# Altium PCB ESC.PcbDoc
Units mil, origin at the board's own origin, x right, y up, seen from the top; angles counter-clockwise.
Board outline 1770 x 2730 mil, 2 copper layers (Top Layer, Bottom Layer); 74 components, 54 nets, 303 pads, 42 vias.
Unrouted connection lines stored in the file: 85.
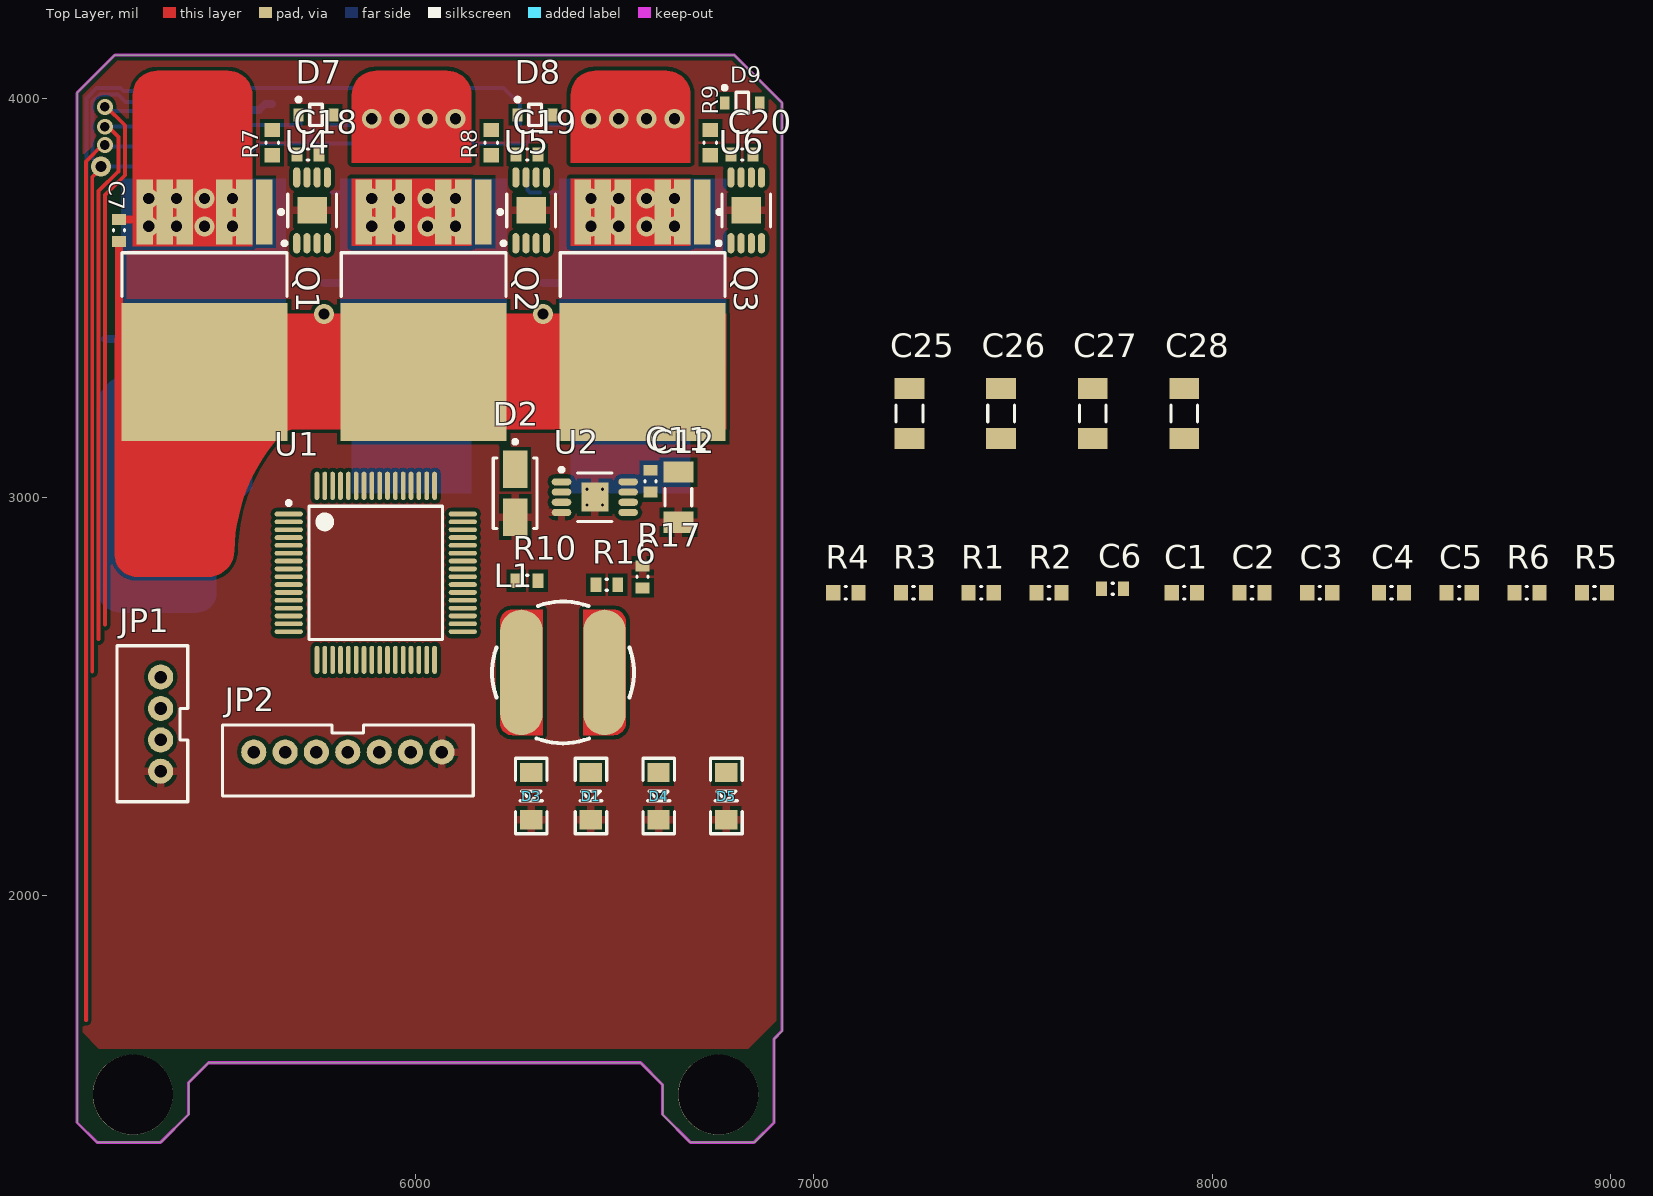
[diagram p0: Top Layer view]
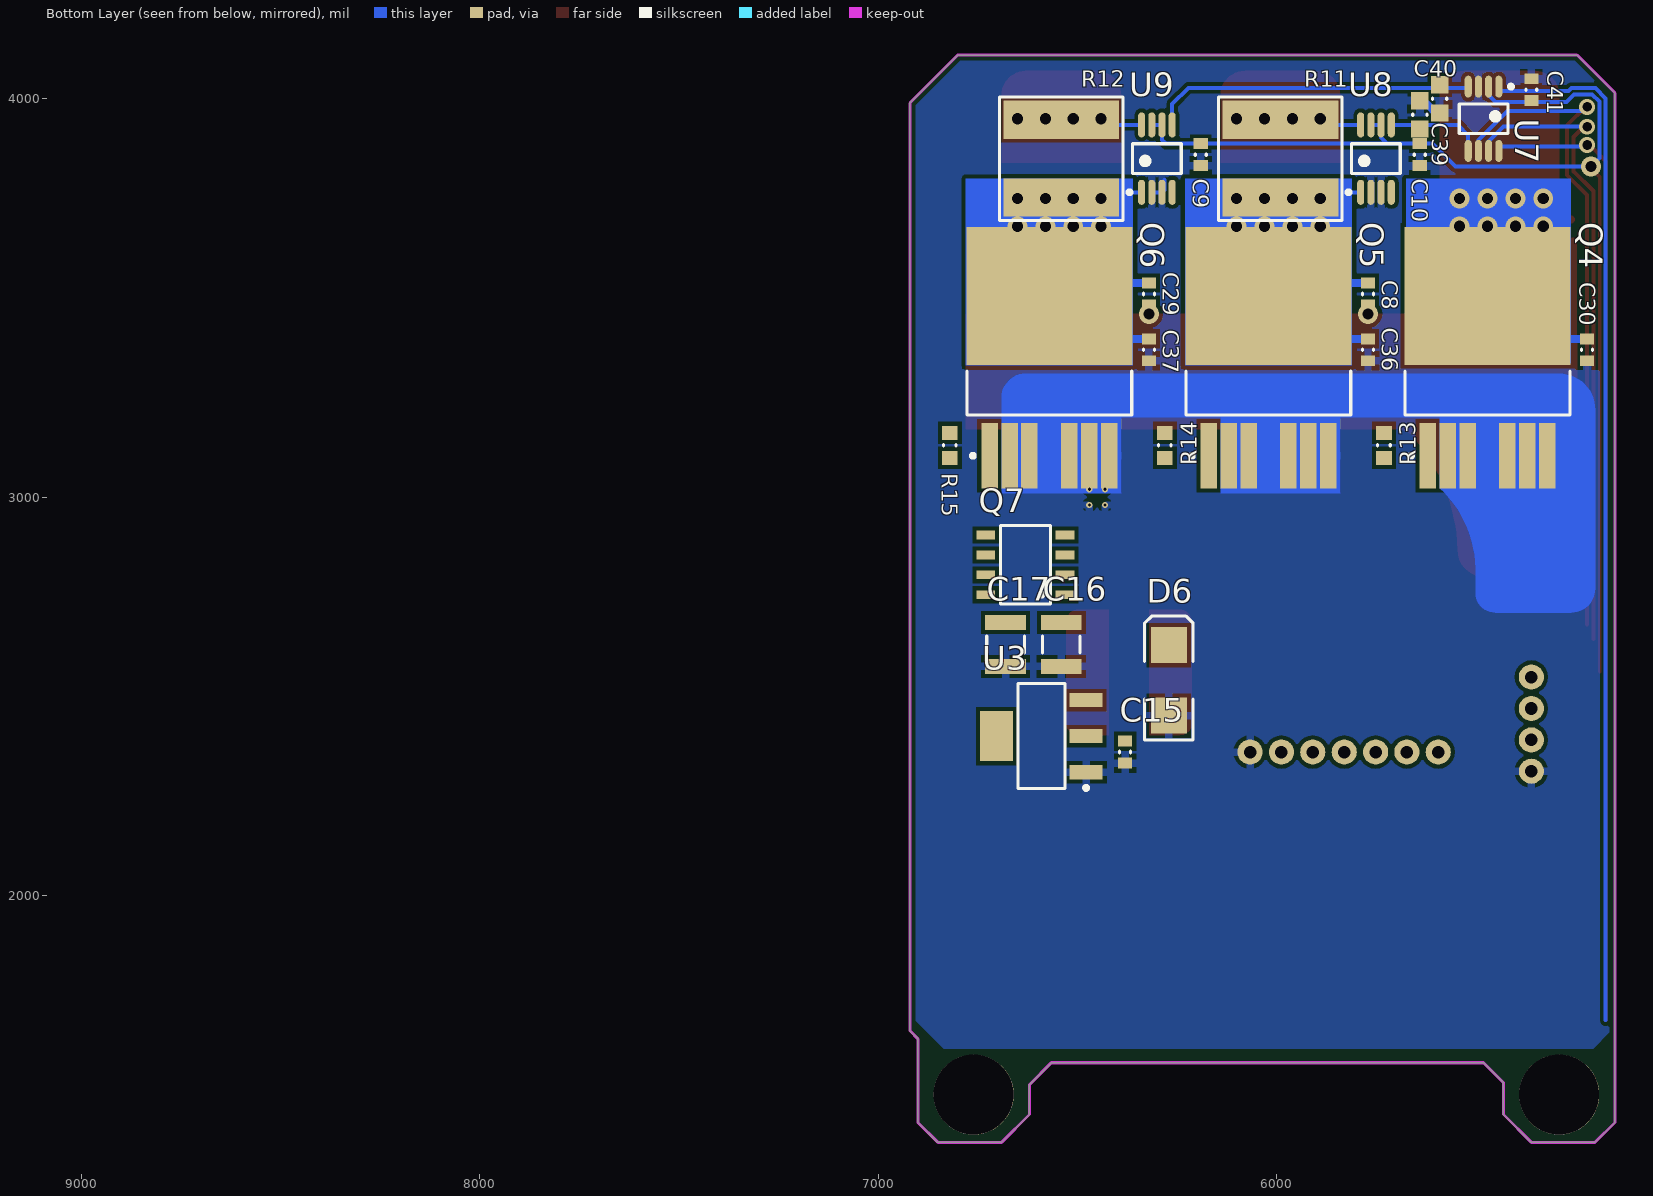
[diagram p1: Bottom Layer view, seen from below]

## Layer stack, top to bottom
Top Solder: solder mask 0.4, Solder Resist, Dk 3.5
Top Layer: signal copper 1.4
Dielectric 1: dielectric 12.6, FR-4, Dk 4.8
Bottom Layer: signal copper 1.4
Bottom Solder: solder mask 0.4, Solder Resist, Dk 3.5

## Board outline
5150,1430 5200,1380 5360,1380 5430,1450 5430,1530 5480,1580 6565,1580 6620,1525 6620,1450 6690,1380 6850,1380 6900,1430 6900,1640 6920,1660 6920,3990 6800,4110 5245,4110 5150,4015

## Design rules (kind name [scope] priority, off if disabled: settings)
Clearance Clearance_1 [InPolygon] p1: gap=9.84
Clearance [All] p2: gap=5.91
PolygonConnect [All] p1: connectstyle=Relief reliefconductorwidth=20 reliefentries=4 polygonreliefangle="90 Angle" airgapwidth=10
RoutingVias [All] p1: holewidth=28 width=50 viastyle="Through Hole" minholewidth=24 minwidth=40 maxholewidth=28 maxwidth=50
SolderMaskExpansion [All] p1: expansion=4
Width [All] p1: maxlimit=60 minlimit=10 preferedwidth=10
30 further rules are at their usual default settings.

## Classes and differential pairs
component class ESC: JP1 JP2
component class U_MCU: C1 C2 C3 C4 C5 C6 C9 C10 C39 C40 C41 D1 D3 D4 D5 R1 R2 R3 R4 R5 R6 U1 U7 U8 U9
component class U_Power: C7 C8 C11 C12 C15 C16 C17 C18 C19 C20 C25 C26 C27 C28 C29 C30 C36 C37 D2 D6 D7 D8 D9 L1 Q1 Q2 Q3 Q4 Q5 Q6 Q7 R7 R8 R9 R10 R11 R12 R13 R14 R15 R16 R17 U2 U3 U4 U5 U6

## Components (designator, comment, footprint, x,y, rotation, side; value= is the part's Value field where it differs from the comment)
C1 "2.2uF" CAPC0603(1608)55_N 7930,2760 r0 top
C2 "2.2uF" CAPC0603(1608)55_N 8100,2760 r0 top
C3 "2.2uF" CAPC0603(1608)55_N 8270,2760 r0 top
C4 "2.2uF" CAPC0603(1608)55_N 8450,2760 r0 top
C5 "2.2uF" CAPC0603(1608)55_N 8620,2760 r0 top
C6 "0.1uF" CAPC0603(1608)100_L 7750,2770 r0 top
C7 "100nF" CAPC0603(1608)100_L 5255,3670 r270 top
C8 "100nF" CAPC0603(1608)100_L 5770,3510 r270 bottom
C9 "0.1uF" CAPC0603(1608)100_L 6190,3860 r90 bottom
C10 "0.1uF" CAPC0603(1608)100_L 5640,3860 r90 bottom
C11 "0.47uF" CAPC0603(1608)100_L 6590,3040 r90 top
C12 "10uF" CAPC1206(3216)190_M 6660,3000 r90 top
C15 "10uF" CAPC0603(1608)100_L 6380,2360 r90 bottom
C16 "47uF" CAPC1210(3225)280_L 6540,2630 r90 bottom
C17 "47uF" CAPC1210(3225)280_L 6680,2630 r90 bottom
C18 "1uF" CAPC0603(1608)100_L 5730,3860 r0 top
C19 "1uF" CAPC0603(1608)100_L 6280,3860 r0 top
C20 "1uF" CAPC0603(1608)100_L 6820,3860 r0 top
C25 "10uF" CAPC1206(3216)190_M 7240,3210 r90 top
C26 "10uF" CAPC1206(3216)190_M 7470,3210 r90 top
C27 "10uF" CAPC1206(3216)190_M 7700,3210 r90 top
C28 "10uF" CAPC1206(3216)190_M 7930,3210 r90 top
C29 "100nF" CAPC0603(1608)100_L 6320,3510 r270 bottom
C30 "100nF" CAPC0603(1608)100_L 5220,3370 r90 bottom
C36 "100nF" CAPC0603(1608)100_L 5770,3370 r90 bottom
C37 "100nF" CAPC0603(1608)100_L 6320,3370 r90 bottom
C39 "0.1uF" CAPC0603(1608)100_M 5640,3960 r270 bottom
C40 "0.1uF" CAPC0603(1608)100_M 5590,4000 r90 bottom
C41 "2.2uF" CAPC0603(1608)100_L 5360,4022.87 r270 bottom
D1 "LED-BLUE" LED-1206 6440,2250 r270 top
D2 "TVS 50V" VISH-DO-214AC-2_N 6250,3010 r270 top
D3 "LED-GREEN" LED-1206 6290,2250 r270 top
D4 "LED-RED" LED-1206 6610,2250 r270 top
D5 "LED-AMBER" LED-1206 6780,2250 r270 top
D6 "" SMB 6270,2540 r90 bottom
D7 "" ONSC-SOD-323-2-477-02_V 5750,3960 r0 top
D8 "" ONSC-SOD-323-2-477-02_V 6300,3960 r0 top
D9 "" ONSC-SOD-323-2-477-02_V 6820,3990 r0 top
JP1 "" JST-4-PTH-VERT 5360,2430 r90 top
JP2 "Encoder Pins" JST-7-PTH-VERT 5830,2360 r180 top
L1 "SDR0805-180ML" SDR0805-180ML 6370,2560 r0 top
Q1 "IRFS7530" DPAK127P1525X483-7N 5470,3470 r270 top
Q2 "IRFS7530" DPAK127P1525X483-7N 6020,3470 r270 top
Q3 "IRFS7530" DPAK127P1525X483-7N 6570,3470 r270 top
Q4 "IRFS7530" DPAK127P1525X483-7N 5470,3350 r90 bottom
Q5 "IRFS7530" DPAK127P1525X483-7N 6020,3350 r90 bottom
Q6 "IRFS7530" DPAK127P1525X483-7N 6570,3350 r90 bottom
Q7 "MOSFET-P" SOIC127P600X175-8N 6630,2830 r0 bottom
R1 "10R" RESC0603(1608)_N 7420,2760 r0 top
R2 "15R" RESC0603(1608)_N 7590,2760 r0 top
R3 "180R" RESC0603(1608)_N 7250,2760 r0 top
R4 "150R" RESC0603(1608)_N 7080,2760 r0 top
R5 "200K" RESC0603(1608)_N 8960,2760 r0 top
R6 "10K" RESC0603(1608)_N 8790,2760 r0 top
R7 "4R7" RESC0603(1608)_N 5640,3890 r90 top
R8 "4R7" RESC0603(1608)_N 6190,3890 r90 top
R9 "4R7" RESC0603(1608)_N 6740,3890 r90 top
R10 "1M" RESC0603(1608)_L 6280,2790 r180 top
R11 "" Shunt 5990,3850 r270 bottom
R12 "" Shunt 6540,3850 r270 bottom
R13 "4R7" RESC0603(1608)_N 5730,3130 r90 bottom
R14 "4R7" RESC0603(1608)_N 6280,3130 r90 bottom
R15 "4R7" RESC0603(1608)_N 6820,3130 r270 bottom
R16 "36K" RESC0603(1608)_L 6480,2780 r180 top
R17 "3K9" RESC0603(1608)_L 6570,2800 r270 top
U1 "MC-ARM-STM32F4X5-SQ64" STM-LQFP64_N 5900,2810 r0 top
U2 "LM5085QMY/NOPB" MUY08A_L 6450,3000 r0 top
U3 "LD1117AS33TR" SOT-223_L 6590,2400 r0 bottom
U4 "LT-LTC444X-MS8E-8" LT-MS8E-8-EDP_L 5740,3720 r90 top
U5 "LT-LTC444X-MS8E-8" LT-MS8E-8-EDP_L 6290,3720 r90 top
U6 "LT-LTC444X-MS8E-8" LT-MS8E-8-EDP_L 6830,3720 r90 top
U7 "ADC122S101CIMM/NOPB" MUA08A_L 5480,3950 r270 bottom
U8 "AD8418" MSOP-8 5750,3850 r90 bottom
U9 "AD8418" MSOP-8 6300,3850 r90 bottom

## Footprints (in the part's own frame and the unit in brackets; to place one, negate y for a bottom-side part, rotate by r counter-clockwise, add the part's x,y. Pads: shape width x height; smd on the part's side, far side on the other; paste and mask are expansions set on the pad)
CAPC0603(1608)55_N [mm] "Chip Capacitor, Body 1.6x0.8mm, Height 0.55mm, IPC Medium Density"
  rect 0.9x1 smd: 1(-0.8,0) 2(0.8,0)
  silkscreen extent -0.05,-0.4 0.05,0.4, body extent -0.87,-0.48 0.88,0.47, height 0.55
CAPC0603(1608)100_L [mm] "Chip Capacitor, Body 1.6x0.8mm, Height 1.0mm, IPC High Density"
  rect 0.7x0.9 smd: 1(-0.7,0) 2(0.7,0)
  silkscreen extent -0.05,-0.35 0.05,0.35, body extent -0.87,-0.47 0.88,0.48, height 1
CAPC0603(1608)100_M [mm] "Chip Capacitor, Body 1.6x0.8mm, Height 1.0mm, IPC Low Density"
  rect 1.1x1.1 smd: 1(-0.9,0) 2(0.9,0)
  silkscreen extent -0.05,-0.45 0.05,0.45, body extent -0.87,-0.47 0.88,0.48, height 1
CAPC1206(3216)190_M [mm] "Chip Capacitor, Body 3.2x1.6mm, Height 1.9mm, IPC Low Density"
  rect 1.35x1.9 smd: 1(-1.6,0) 2(1.6,0)
  silkscreen extent -0.55,-0.85 0.55,0.85, body extent -1.7,-0.9 1.7,0.9, height 1.9
CAPC1210(3225)280_L [mm] "Chip Capacitor, Body 3.2x2.5mm, Height 2.8mm, IPC High Density"
  rect 0.95x2.6 smd: 1(-1.4,0) 2(1.4,0)
  silkscreen extent -0.55,-1.2 0.55,1.2, body extent -1.7,-1.4 1.7,1.4, height 2.8
DPAK127P1525X483-7N [mm] "D2-PAK, 7-Pads, Body 7.93x8.63mm (max), IPC Medium Density"
  rect 4.15x1.05 smd mask+0.051: 1(-6.25,3.81) 2(-6.25,2.54) 2(-6.25,-1.27) 2(-6.25,1.27) 2(-6.25,-3.81) 2(-6.25,-2.54)
  rect 8.8x10.6 smd: 8(3.95,0)
  silkscreen extent -6.37,-5.25 -0.85,5.25, body extent -7,-5 8,5, height 4.2
JST-4-PTH-VERT [mil]
  round 63 hole 31.5: 1(-118.11,0) 2(-39.37,0) 3(39.37,0) 4(118.37,0)
  silkscreen extent -195,-68 197,110, body extent -195,-67 195,110, height 236
JST-7-PTH-VERT [mil]
  round 63 hole 31.5: 1(-236.22,0) 2(-157.48,0) 3(-78.74,0) 4(0.26,0) 5(79.26,0) 6(157.48,0) 7(236.22,0)
  silkscreen extent -315,-68 315,110, body extent -317,-67 309,110, height 236
LED-1206 [mil]
  rect 48x56 smd: A(-59.06,0) C(60,0)
  silkscreen extent -94,-39 95,40
LT-MS8E-8-EDP_L [mm] "SOP, 8-Leads, Body 3.1x3.1mm, Pitch 0.65mm, Thermal Pad 1.88x1.68mm, IPC High Density"
  oval 1.3x0.45 smd: 1(-2.1,0.975) 2(-2.1,0.325) 3(-2.1,-0.325) 4(-2.1,-0.975) 5(2.1,-0.975) 6(2.1,-0.325) 7(2.1,0.325) 8(2.1,0.975)
  rect 1.68x1.88 smd: 9(0,0)
  silkscreen extent -2.22,-1.55 1.05,1.87, body extent -1.55,-1.55 1.55,1.55, height 1.1
MSOP-8 [mm] "SOP, 8-Leads, Body 3x3mm, Pitch 0.65mm, IPC Medium Density"
  oval 1.6x0.45 smd: 1(-2.15,0.975) 2(-2.15,0.325) 3(-2.15,-0.325) 4(-2.15,-0.975) 5(2.15,-0.975) 6(2.15,-0.325) 7(2.15,0.325) 8(2.15,0.975)
  silkscreen extent -2.27,-1.55 0.95,1.88, body extent -1.55,-1.55 1.55,1.55, height 0.05
MUA08A_L [mm] "TSOP, 8-Leads, Body 3x3mm, Pitch 0.65mm, IPC High Density"
  oval 1.4x0.45 smd: 1(-2.05,0.975) 2(-2.05,0.325) 3(-2.05,-0.325) 4(-2.05,-0.975) 5(2.05,-0.975) 6(2.05,-0.325) 7(2.05,0.325) 8(2.05,0.975)
  silkscreen extent -2.17,-1.55 0.95,1.87, body extent -1.55,-1.55 1.55,1.55, height 1.09
MUY08A_L [mm] "TSOP, 8-Leads, Body 3x3mm, Pitch 0.65mm, Thermal Pad, IPC High Density"
  oval 1.25x0.45 smd: 1(-2.125,0.975) 2(-2.125,0.325) 3(-2.125,-0.325) 4(-2.125,-0.975) 5(2.125,-0.975) 6(2.125,-0.325) 7(2.125,0.325) 8(2.125,0.975)
  rect 1.73x1.85 smd: 9(0,0)
  silkscreen extent -2.25,-1.55 1.1,1.87, body extent -1.55,-1.55 1.55,1.55, height 1.09
ONSC-SOD-323-2-477-02_V [mm] "SOD, 2-Leads, Body 1.7x1.25mm"
  rect 0.63x0.83 smd: 1(-1.115,0) 2(1.115,0)
  silkscreen extent -1.24,-0.67 0.4,1.09, body extent -0.85,-0.63 0.85,0.63, height 1.06
RESC0603(1608)_L [mm] "Chip Resistor, Body 1.6x0.8mm, IPC High Density"
  rect 0.7x0.9 smd: 1(-0.7,0) 2(0.7,0)
  silkscreen extent -0.05,-0.35 0.05,0.35, body extent -0.85,-0.47 0.85,0.47, height 0.6
RESC0603(1608)_N [mm] "Chip Resistor, Body 1.6x0.8mm, IPC Medium Density"
  rect 0.9x1 smd: 1(-0.8,0) 2(0.8,0)
  silkscreen extent -0.05,-0.4 0.05,0.4, body extent -0.85,-0.47 0.85,0.47, height 0.6
SDR0805-180ML [mm]
  rrect100% 2.7x8 smd: 1(-2.65,0) 2(2.65,0)
  Top Layer region: -3.25,4 -1.3,4 -1.3,-4 -3.25,-4 -3.537,-3.943 -3.78,-3.78 -3.943,-3.537 -4,-3.25 -4,-3.25 -4,3.25 -3.943,3.537 -3.78,3.78 -3.537,3.943 -3.25,4
  Top Layer region: 3.25,4 1.3,4 1.3,-4 3.25,-4 3.537,-3.943 3.78,-3.78 3.943,-3.537 4,-3.25 4,-3.25 4,3.25 3.943,3.537 3.78,3.78 3.537,3.943 3.25,4
  silkscreen extent -4.52,-4.53 4.52,4.52
Shunt [mm]
  rect 2.44x7.38 smd: 1(-2.48,0) 2(2.48,0)
  silkscreen extent -3.94,-3.94 3.94,3.94
SMB [mm] "DO-214-AA/SMB; 2 C-Bend Leads; Body 5.3 x 3.6 mm, inc. leads (LxW)"
  rect 2.3x2.3 smd: 1(-2.25,0) 2(2.25,0)
  silkscreen extent -3.8,-1.55 4.1,1.55
SOIC127P600X175-8N [mm] "SOIC, 8-Leads, Body 4.90x3.90mm, Pitch 1.27mm, IPC Medium Density"
  rect 1.194x0.56 smd: 1(-2.528,-0.635) 1(-2.528,0.635) 1(-2.528,1.905) 2(-2.528,-1.905) 3(2.527,-1.905) 3(2.527,-0.635) 3(2.527,0.635) 3(2.527,1.905)
  silkscreen extent -1.6,-2.5 1.6,2.5
SOT-223_L [mm] "SOT223, 4-Leads, Body 6.5x3.5mm, Pitch 2.3mm, Lead Span 7mm, IPC High Density"
  rect 2.1x0.9 smd: 1(-2.85,2.3) 2(-2.85,0) 3(-2.85,-2.3)
  rect 2.1x3.2 smd: 4(2.85,0)
  silkscreen extent -2.97,-3.35 1.5,3.42, body extent -1.85,-3.35 1.85,3.35, height 1.8
STM-LQFP64_N [mm] "Thin QFP, 64-Leads, Body 10x10mm, Pitch 0.5mm, IPC Medium Density"
  oval 1.8x0.3 smd: 1(-5.55,3.75) 2(-5.55,3.25) 3(-5.55,2.75) 4(-5.55,2.25) 5(-5.55,1.75) 6(-5.55,1.25) 7(-5.55,0.75) 8(-5.55,0.25) 9(-5.55,-0.25) 10(-5.55,-0.75) 11(-5.55,-1.25) 12(-5.55,-1.75) 13(-5.55,-2.25) 14(-5.55,-2.75) 15(-5.55,-3.25) 16(-5.55,-3.75) 33(5.55,-3.75) 34(5.55,-3.25) 35(5.55,-2.75) 36(5.55,-2.25) 37(5.55,-1.75) 38(5.55,-1.25) 39(5.55,-0.75) 40(5.55,-0.25) 41(5.55,0.25) 42(5.55,0.75) 43(5.55,1.25) 44(5.55,1.75) 45(5.55,2.25) 46(5.55,2.75) 47(5.55,3.25) 48(5.55,3.75)
  oval 0.3x1.8 smd: 17(-3.75,-5.55) 18(-3.25,-5.55) 19(-2.75,-5.55) 20(-2.25,-5.55) 21(-1.75,-5.55) 22(-1.25,-5.55) 23(-0.75,-5.55) 24(-0.25,-5.55) 25(0.25,-5.55) 26(0.75,-5.55) 27(1.25,-5.55) 28(1.75,-5.55) 29(2.25,-5.55) 30(2.75,-5.55) 31(3.25,-5.55) 32(3.75,-5.55) 49(3.75,5.55) 50(3.25,5.55) 51(2.75,5.55) 52(2.25,5.55) 53(1.75,5.55) 54(1.25,5.55) 55(0.75,5.55) 56(0.25,5.55) 57(-0.25,5.55) 58(-0.75,5.55) 59(-1.25,5.55) 60(-1.75,5.55) 61(-2.25,5.55) 62(-2.75,5.55) 63(-3.25,5.55) 64(-3.75,5.55)
  silkscreen extent -5.67,-4.25 4.25,4.57, body extent -5,-5 5,5, height 1.6
VISH-DO-214AC-2_N [mm] "DO-214AC, 2-Leads, Body 4.5x2.79mm, IPC Medium Density"
  rect 2.4x1.55 smd: 1(-1.525,0) 2(1.525,0)
  silkscreen extent -3.4,-1.4 2.25,1.4, body extent -2.25,-1.4 2.25,1.39, height 2.29

## Part data
C1 C2 C3 C4 C5: library part CMP-1035-02762-1, "CAP 2.2uF 16V ±10% 0603 (1608 Metric) Thickness 0.55mm SMD"
C6 C7 C8 C29 C30 C36 C37: library part CMP-1035-02591-1, "CAP 100nF 50V ±5% 0603 (1608 Metric) Thickness 1mm SMD"
C9 C10: library part CMP-1035-02577-1, "CAP 100nF 6.3V ±20% 0603 (1608 Metric) Thickness 1mm SMD"
C11: library part CMP-1035-02708-1, "CAP 470nF 50V ±10% 0603 (1608 Metric) Thickness 1mm SMD"
C12 C25 C26 C27 C28: library part CMP-1037-04982-1, "CAP 10uF 50V ±10% 1206 (3216 Metric) Thickness 1.9mm SMD"
C15: library part CMP-1035-02796-1, "CAP 10uF 6.3V ±10% 0603 (1608 Metric) Thickness 1mm SMD"
C16 C17: library part CMP-1038-02295-1, "CAP 47uF 16V ±10% 1210 (3225 Metric) Thickness 2.8mm SMD"
C18 C19 C20: library part CMP-1035-02736-1, "CAP 1uF 16V ±5% 0603 (1608 Metric) Thickness 1mm SMD"
C39 C40: library part CMP-1035-02575-1, "CAP 100nF 6.3V ±5% 0603 (1608 Metric) Thickness 1mm SMD"
C41: library part CMP-1035-02754-1, "CAP 2.2uF 6.3V ±10% 0603 (1608 Metric) Thickness 1mm SMD"
D1: library part LED-BLUE1206
D2: library part CMP-0548-00253-1, "Transient Voltage Suppressor, 6.40 to 231 V, 45 V Stand-off Voltage, Uni-Directional, -55 to 155 degC, 2-pin DO-214AC, Pb-Free, Tape and Reel"
D3: library part LED-GREEN1206
D4: library part LED-RED1206
D5: library part LED-AMBER1206
D6: library part "D Schottky", "Schottky Diode"
D7 D8 D9: library part CMP-1051-00017-1, "Silicon Hot-Carrier Diode, Schottky Barrier Diode, 2-Pin SOD-323, Pb-Free, Tape and Reel"
JP1: library part JST_4_VERT
JP2: library part JST_7_VERT
L1: "Inductor"
Q1 Q2 Q3 Q4 Q5 Q6: "N-Channel MOSFET"
Q7: "P-Channel MOSFET"
R1: library part CMP-1012-00026-1, "10R 0.1W 5% 0603 (1608 Metric)  SMD"
R2: library part CMP-1012-00030-1, "15R 0.1W 5% 0603 (1608 Metric)  SMD"
R3: library part CMP-1012-00056-1, "180R 0.1W 5% 0603 (1608 Metric)  SMD"
R4: library part CMP-1012-00054-1, "150R 0.1W 5% 0603 (1608 Metric)  SMD"
R5: library part CMP-1012-00129-1, "200K 0.1W 5% 0603 (1608 Metric)  SMD"
R6: library part CMP-1012-00098-1, "10K 0.1W 5% 0603 (1608 Metric)  SMD"
R7 R8 R9 R13 R14 R15: library part CMP-1012-00018-1, "4R7 0.1W 5% 0603 (1608 Metric)  SMD"
R10: library part CMP-1012-00146-1, "1M 0.1W 5% 0603 (1608 Metric)  SMD"
R11: library part Shunt, "0.001R"
R12: library part Shunt, "Resistor"
R16: library part CMP-1012-00111-1, "36K 0.1W 5% 0603 (1608 Metric)  SMD"
R17: library part CMP-1012-00088-1, "3K9 0.1W 5% 0603 (1608 Metric)  SMD"
U2: library part CMP-0069-01314-2, "75V Constant On-Time PFET Buck Switching Controller, 8-pin eMSOP, Pb-Free"
U3: library part CMP-0244-00316-1, "1A, Low Drop Positive Voltage Regulator, 3.3V, 4-Pin SOT-223, Tape and Reel"
U7: library part CMP-0054-00398-2, "2 Channel, 500 kSPS to 1 MSPS 12-Bit A/D Converter, 8-pin Mini SOIC, Pb-Free"

## Free pads (board coordinates)
  round 201 hole 201: 0(5290,1500) 1(6760,1500)

## Via types
v1: diameter 50, hole 28, Top Layer to Bottom Layer, 35 vias
v2: diameter 15.75, hole 7.87, Top Layer to Bottom Layer, 4 vias
v3: diameter 40, hole 24, Top Layer to Bottom Layer, 3 vias

## Nets (pads, with @x,y where several pads share a name; then routed paths per layer and width w, separated by ;. In a path a pad name is that pad's centre, name@x,y a point inside that pad or via, vN(x,y) a via of type N, cw(c..) or ccw(c..) an arc to the next point about the centre after c; other vN are vias at no path point)
5V: JP1.4 JP2.7
12V: C16.2 C17.2 D7.2 D8.2 D9.2 L1.2 R16.2 U3.3 U4.3 U5.3 U6.3
ADC_CS: U7.1 | length 2594.3
  Bottom Layer w10: 5173.19,1686.81 5173.19,4000.68 5199.32,4026.81 5259.39,4026.81 5266.2,4020 U7.1@5440,4020
C1: C39.2 U7.5 U8.5 | length 266.9
  Bottom Layer w10: U7.5 5518.39,3908.39 5544.65,3934.65 U8.5 U8.5@5711.61,3958.39
C2: C40.2 U7.4 U9.5 | length 812.4
  Bottom Layer w10: U7.4@5518.39,4027.56 6221.04,4027.56 6261.61,3986.98 U9.5
CLK: JP2.5
CS: JP2.6
DIO: JP2.4
GHA: R7.2 U4.7
GHB: R8.2 U5.7
GHC: R9.2 U6.7
GLA: R13.2 U4.4
GLB: R14.2 U5.4
GLC: R15.2 U6.4
GND: C1.1 C2.1 C3.1 C4.1 C5.1 C6.2 C9.1 C10.1 C12.1 C15.1 C16.1 C17.1 C25.1 C26.1 C27.1 C28.1 C30.1 C36.1 C37.1 C39.1 C40.1 C41.1 D1.C D2.2 D3.C D4.C D5.C D6.1 JP1.1 JP2.1 Q4.2 Q5.2 Q6.2 R6.2 R17.1 U2.4 U2.9 U3.1 U4.9 U5.9 U6.9 U7.3 U8.2 U8.3 U9.2 U9.3 | length 115.1
  Bottom Layer w10: 6281.38,3796.18 6281.38,3771.18 U9.3 U9.2
  Bottom Layer w20: C40.1@5590,3972.44 5607.44,3972.44 5622.56,3987.56 C39.1@5640,3987.56
  other v2: 6430.31,2980.31 6469.69,2980.31 6430.31,3019.68 6469.69,3019.68
NetC6_1: C6.1 R5.1 R6.1
NetC11_1: C11.1 U2.7
NetC18_2: C18.2 D7.1 U4.6
NetC19_2: C19.2 D8.1 U5.6
NetC20_2: C20.2 D9.1 U6.6
NetD1_A: D1.A R1.1
NetD3_A: D3.A R2.1
NetD4_A: D4.A R3.1
NetD5_A: D5.A R4.1
NetD6_2: D6.2 L1.1 Q7.1 U2.5
NetQ1_2: Q1.1 R7.1
NetQ2_2: Q2.1 R8.1
NetQ3_2: Q3.1 R9.1
NetQ4_2: Q4.1 R13.1
NetQ5_2: Q5.1 R14.1
NetQ6_2: Q6.1 R15.1
NetQ7_1: Q7.2 U2.6
NetR10_1: R10.1 U2.1
NetR11_1: R11.1 U8.8 | length 108
  Bottom Layer w10: U8.8 5874.65,3934.65 v1(5890,3950)
  other v1: 5960,3950 6030,3950 6100,3950
NetR12_1: R12.1 U9.8 | length 108
  Bottom Layer w10: U9.8 6424.65,3934.65 v1(6440,3950)
  other v1: 6510,3950 6580,3950 6650,3950
NetR16_1: R16.1 R17.2 U2.3
NetU4_1: U4.1
NetU4_2: U4.2
NetU5_1: U5.1
NetU5_2: U5.2
NetU6_1: U6.1
NetU6_2: U6.2
QUAD_A: JP2.3
QUAD_B: JP2.2
SA: C7.1 C18.1 C30.2 Q1.2 Q4.8 U4.8 | length 408
  Top Layer w10: Q1.2@5520,3716.06 Q1.2@5520,3740
  Top Layer w20: C7.1@5260,3697.56 5301.5,3697.56 Q1.2@5320,3716.06
  Bottom Layer w10: v1(5540,3750) v1@5555.35,3765.35
  Bottom Layer w20: C30.2 5362.05,3397.56 Q4.8
  other v1: 5330,3680 5400,3680 5470,3680 5540,3680 5330,3750 5400,3750 5470,3750
SB: C8.1 C19.1 C36.2 Q2.2 Q5.8 R11.2 U5.8 U8.1 | length 725.3
  Top Layer w10: Q2.2@6070,3716.06 6095,3741.06 v1@6095,3765
  Bottom Layer w10: U8.1 5874.65,3765.35 v1(5890,3750)
  Bottom Layer w20: C36.2 5912.05,3397.56 Q5.8 5987.95,3537.56 C8.1
  other v1: 5890,3680 5960,3680 6030,3680 6100,3680 5960,3750 6030,3750 6100,3750
SC: C20.1 C29.1 C37.2 Q3.2 Q6.8 R12.2 U6.8 U9.1 | length 666
  Bottom Layer w10: U9.1 6424.65,3765.35 v1(6440,3750)
  Bottom Layer w20: C37.2 6462.05,3397.56 Q6.8 6537.95,3537.56 C29.1
  other v1: 6440,3680 6510,3680 6580,3680 6650,3680 6510,3750 6580,3750 6650,3750
SCLK: U7.8 | length 2464.3
  Top Layer w10: 5172.28,1687.72 5172.28,3843.06 5213.32,3884.09 v3(5220,3884.09)
  Bottom Layer w10: v3@5220.3,3880 5224.39,3884.09 v3(5220,3884.09) 5229.6,3884.09 5233.7,3880 5441.61,3880 U7.8
SDI: U7.6 | length 1678.6
  Top Layer w10: 5220,2680 5220,3758.19 5270,3808.19 5270,3933.71 5223.71,3980 v3(5220,3980)
  Bottom Layer w10: v3(5220,3980) 5230,3970 5420,3970 5492.8,3897.2 U7.6
SDO: U7.7 | length 1612.1
  Top Layer w10: 5204.09,2643.41 5204.09,3768.19 5254.09,3818.19 5254.09,3903.71 5227.8,3930 v3(5220,3930)
  Bottom Layer w10: v3(5220,3930) 5430,3930 5467.2,3892.8 U7.7
SER_RX: JP1.3
SER_TX: JP1.2
VCC: C1.2 C2.2 C3.2 C4.2 C5.2 C9.2 C10.2 C15.2 C41.2 R1.2 U3.2 U3.4 U7.2 U8.6 U8.7 U9.6 U9.7 | length 3044.4
  Top Layer w10: 5188.19,2561.81 5188.19,3803.33 5214.86,3830 v1(5210,3830)
  Bottom Layer w10: U7.2@5467.2,4050 U7.2 5467.2,4027.61 5468.23,4026.59 5468.23,4013.41 5467.2,4012.39 5467.2,4009.65 5449.8,3992.24 5271.46,3992.24 5252.8,4010.91 5207.2,4010.91 5189.09,3992.8 5189.09,3850.91 v1(5210,3830) 5550,3830 5607.56,3887.56 C10.2 5721.97,3887.56 ; U8.7 U8.6 5737.2,3902.8 5721.97,3887.56 ; U9.7 U9.6 6287.2,3897.2 6277.56,3887.56 C9.2 5721.97,3887.56
VDD: C7.2 C8.2 C11.2 C12.2 C25.2 C26.2 C27.2 C28.2 C29.2 D2.1 Q1.8 Q2.8 Q3.8 Q7.3 R5.2 R10.2 U2.8 | length 524
  Top Layer w20: 5255,3330 C7.2 ; Q3.8@6560,3174.49 6545,3189.49 6620,3264.49 Q3.8
  Top Layer w40: Q2.8 Q2.8@6030.43,3314.49
  Top Layer w50: Q2.8@6030.43,3314.49 Q2.8@6033.52,3314.49
  other v1: 5770,3460 6320,3460
pads on no net: R2.2 R3.2 R4.2 U1.1 U1.2 U1.3 U1.4 U1.5 U1.6 U1.7 U1.8 U1.9 U1.10 U1.11 U1.12 U1.13 U1.14 U1.15 U1.16 U1.17 U1.18 U1.19 U1.20 U1.21 U1.22 U1.23 U1.24 U1.25 U1.26 U1.27 U1.28 U1.29 U1.30 U1.31 U1.32 U1.33 U1.34 U1.35 U1.36 U1.37 U1.38 U1.39 U1.40 U1.41 U1.42 U1.43 U1.44 U1.45 U1.46 U1.47 U1.48 U1.49 U1.50 U1.51 U1.52 U1.53 U1.54 U1.55 U1.56 U1.57 U1.58 U1.59 U1.60 U1.61 U1.62 U1.63 U1.64 U2.2 U4.5 U5.5 U6.5 U8.4 U9.4

## Polygon pours and split planes (outlines as drawn)
GND on Top Layer "GND_L01_P000" (solid, remove dead copper, pour order 0): 5150,4015 5245,4110 6800,4110 6920,3990 6920,1700 6835,1615 5205,1615 5150,1670
GND on Bottom Layer "GND_L02_P002" (solid, remove dead copper, pour order 2): 5150,4015 5245,4110 6800,4110 6920,3990 6920,1700 6835,1615 5205,1615 5150,1670

## Keep-outs
Keep-Out Layer:
  lines w7.87: 5150,1430 5200,1380 5360,1380 5430,1450 5430,1520 5430,1530 5480,1580 6565,1580 6620,1525 6620,1450 6690,1380 6850,1380 6900,1430 6900,1640 6920,1660 6920,3990 6800,4110 5245,4110 5150,4015 5150,3960 5150,1430

## Other copper
Top Layer:
  rectangle net SB: 5839.49,3630 6140,3800
  rectangle net SC: 6389.49,3630 6690,3800
  region net SA: 5290,3630 5590,3630 5590,4010 ccw(c5530,4010) 5530,4070 5350,4070 ccw(c5350,4010) 5290,4010
  region net VDD: 5300,2800 5480,2800 ccw(c5478.57,2865.91) 5544.48,2864.48 cw(c5991.09,2854.79) 5656.82,3151.13 cw(c5697.11,3117.78) 5700,3170 6780,3170 6780,3460 5310,3460 ccw(c5310,3395) 5245,3395 5245,2855 ccw(c5300,2855)
  region net NetR11_1: 5840,3840 6140,3840 6140,4010 ccw(c6080,4010) 6080,4070 5900,4070 ccw(c5900,4010) 5840,4010
  region net NetR12_1: 6390,3840 6690,3840 6690,4010 ccw(c6630,4010) 6630,4070 6450,4070 ccw(c6450,4010) 6390,4010
Bottom Layer:
  rectangle net SB: 5810,3330 6230,3800
  rectangle net SA: 5260,3335 5675,3800
  rectangle net SC: 6360,3330 6780,3800
  region net GND: 6690,3010 6690,3250 ccw(c6630,3250) 6630,3310 5290,3310 ccw(c5289.99,3220.01) 5200,3220 5200,2770 ccw(c5260,2770) 5260,2710 5450,2710 ccw(c5450,2760) 5500,2760 5500,2820 cw(c5781.53,2816.51) 5590,3022.88 5590,3200 5840,3200 5840,3010 6140,3010 6140,3200 6390,3200 6390,3010